# Altium PCB A540R260_ARM2.PcbDoc
Units mm, origin at the board's own origin, x right, y up, seen from the top; angles counter-clockwise.
Board outline 159 x 60.2 mm, 4 copper layers (Top Layer, 5V, GND, Bottom Layer), stack 1.741 mm thick; 32 components, 145 nets, 341 pads, 93 vias.
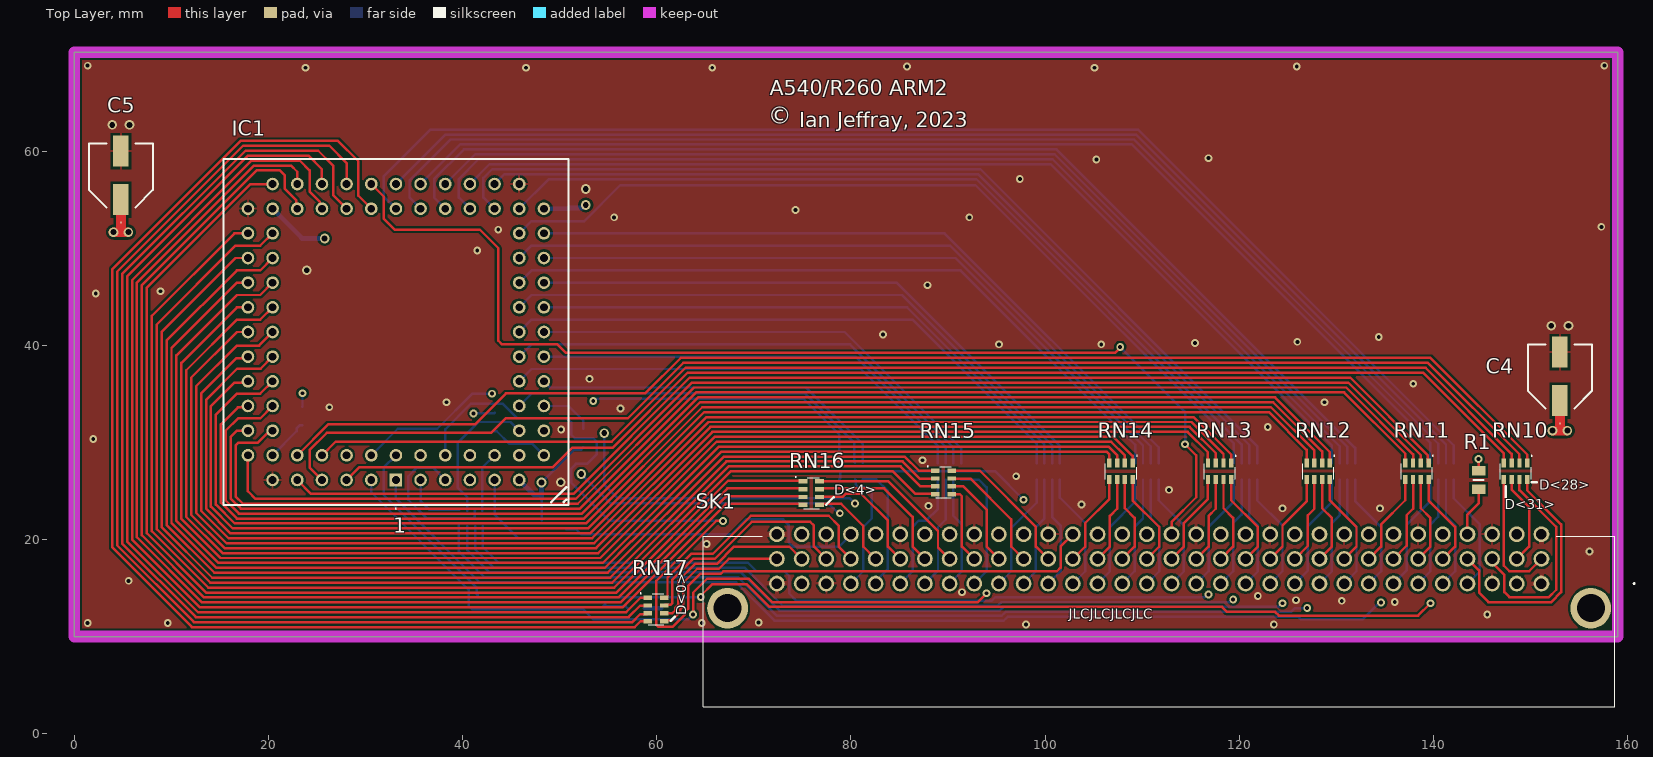
[diagram p0: Top Layer view]
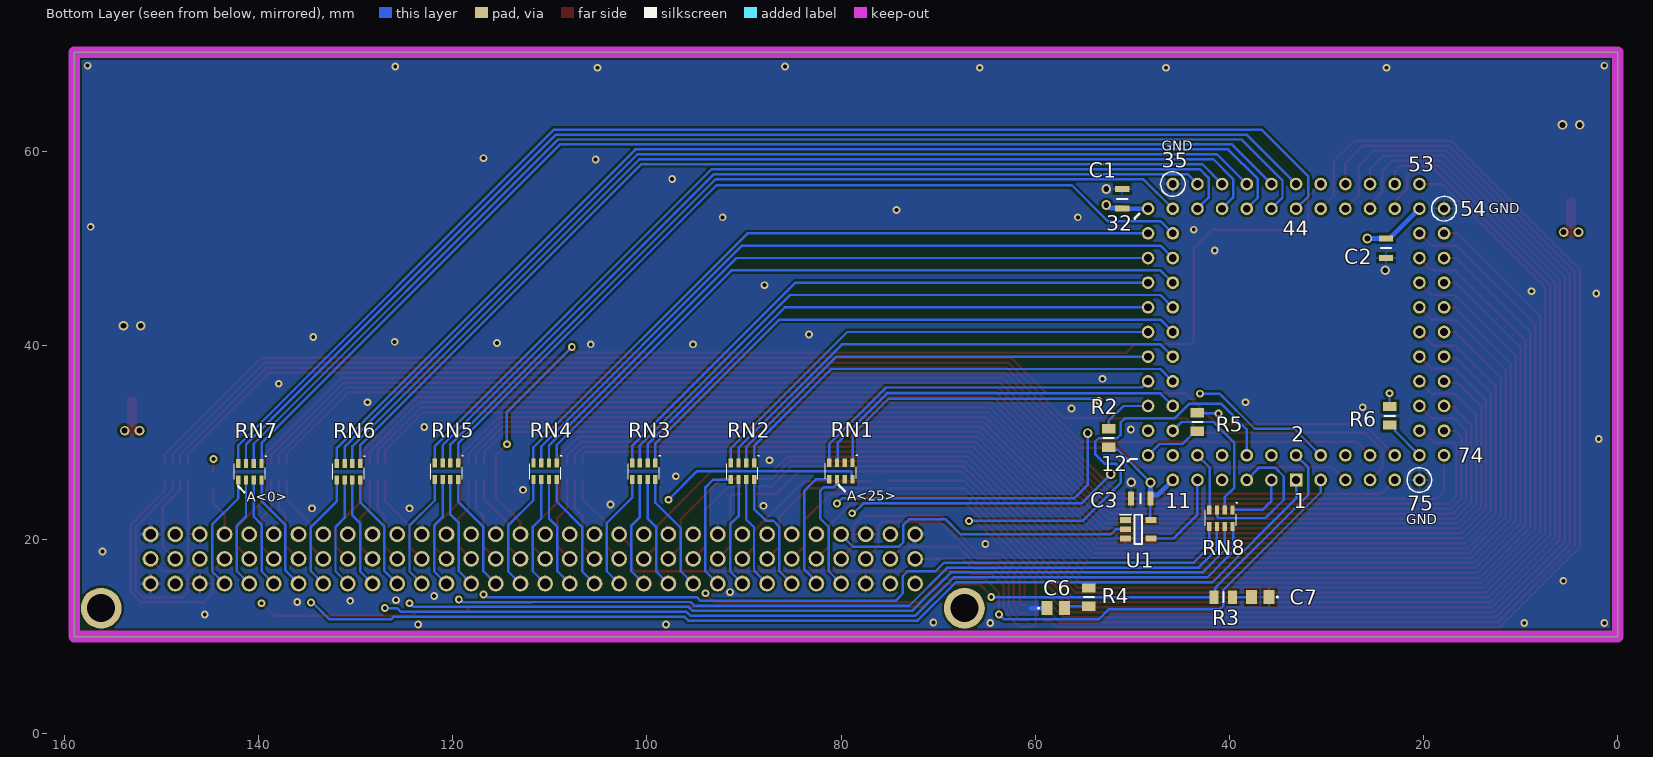
[diagram p1: Bottom Layer view, seen from below]
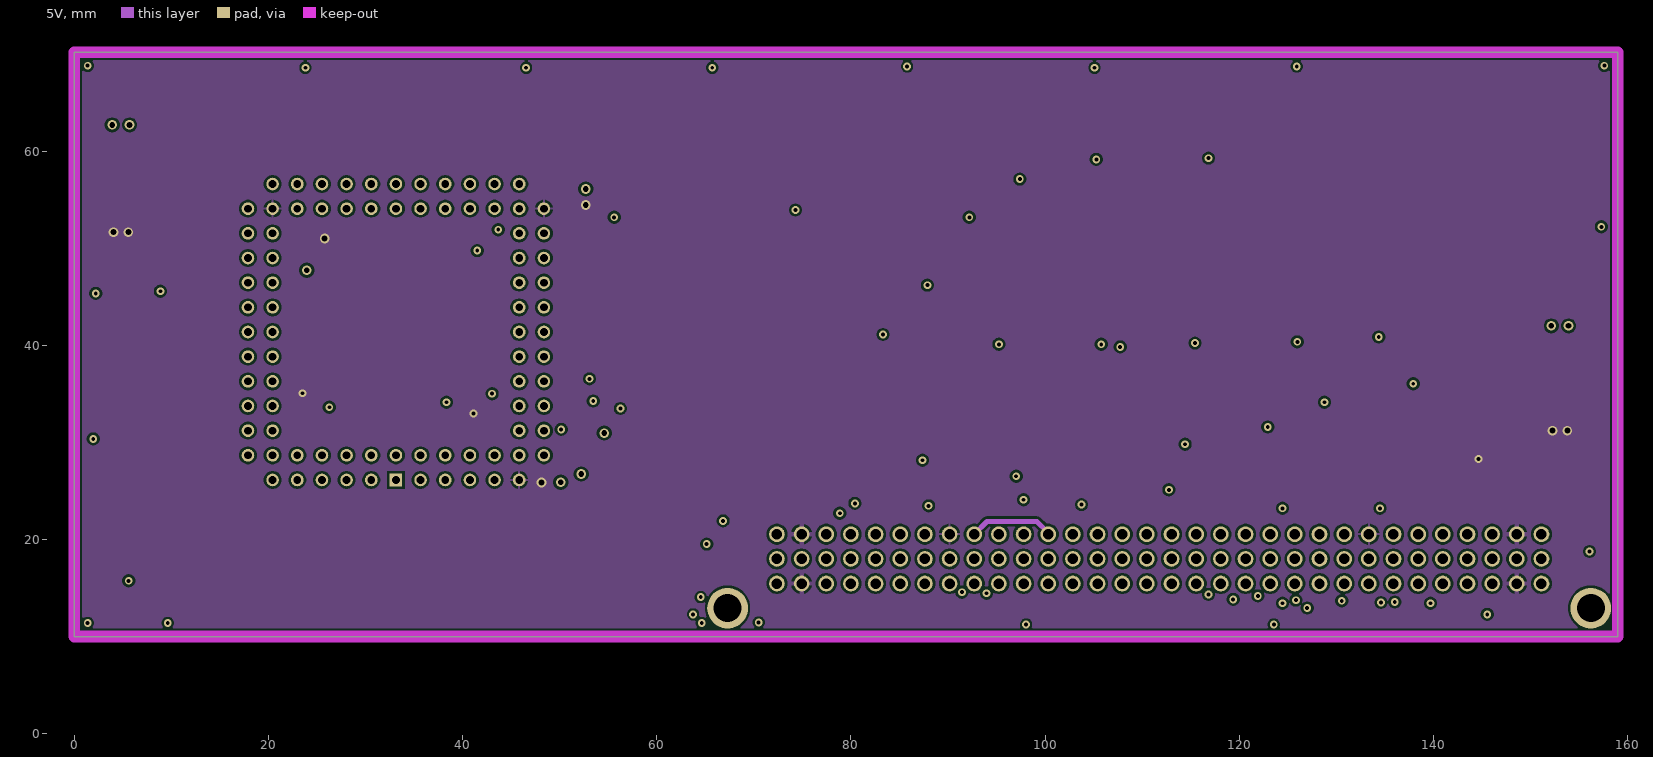
[diagram p2: 5V]
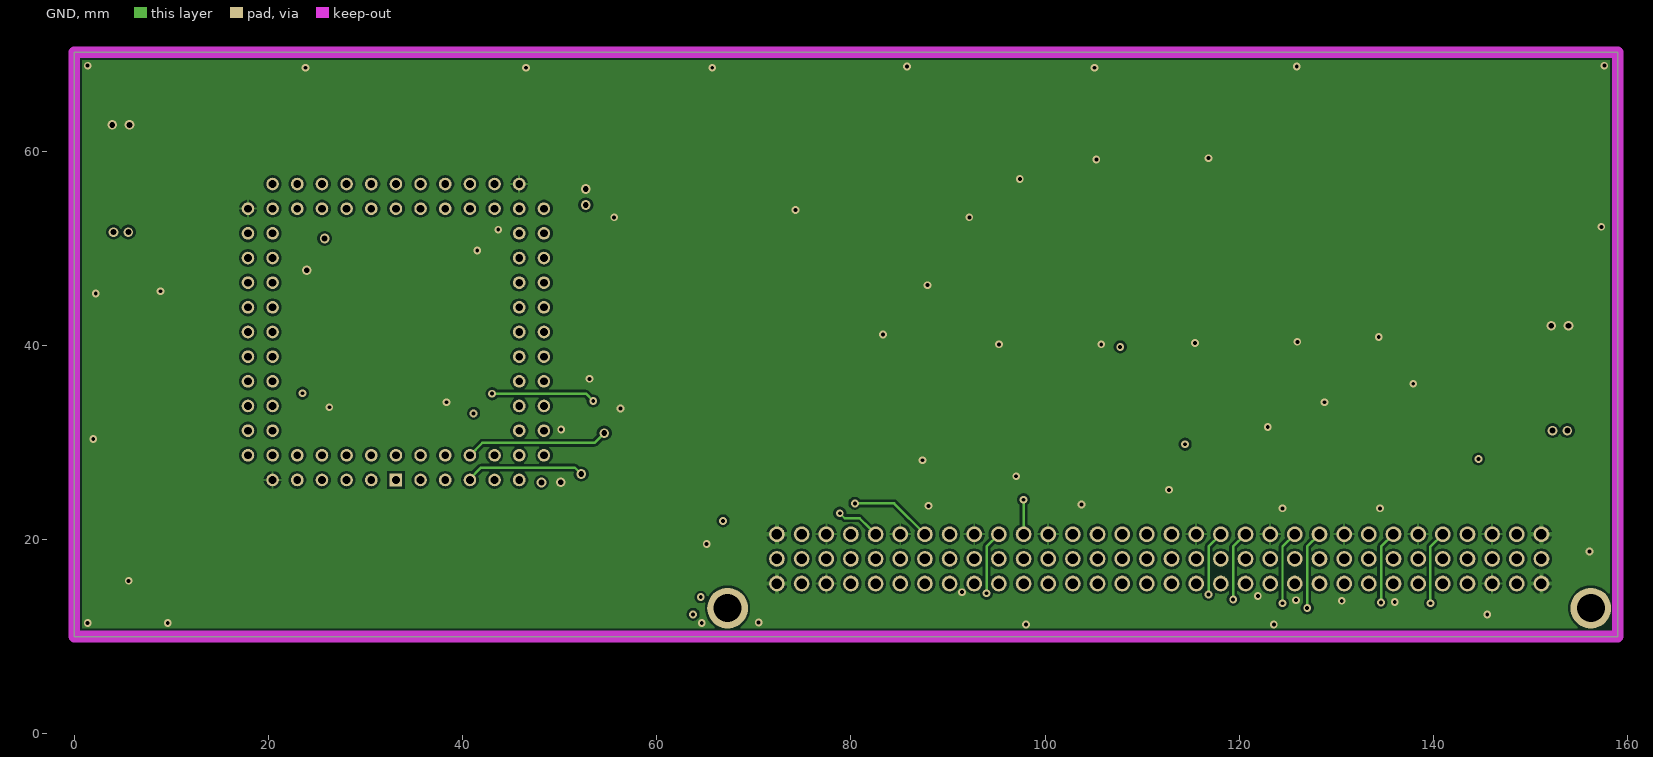
[diagram p3: GND]
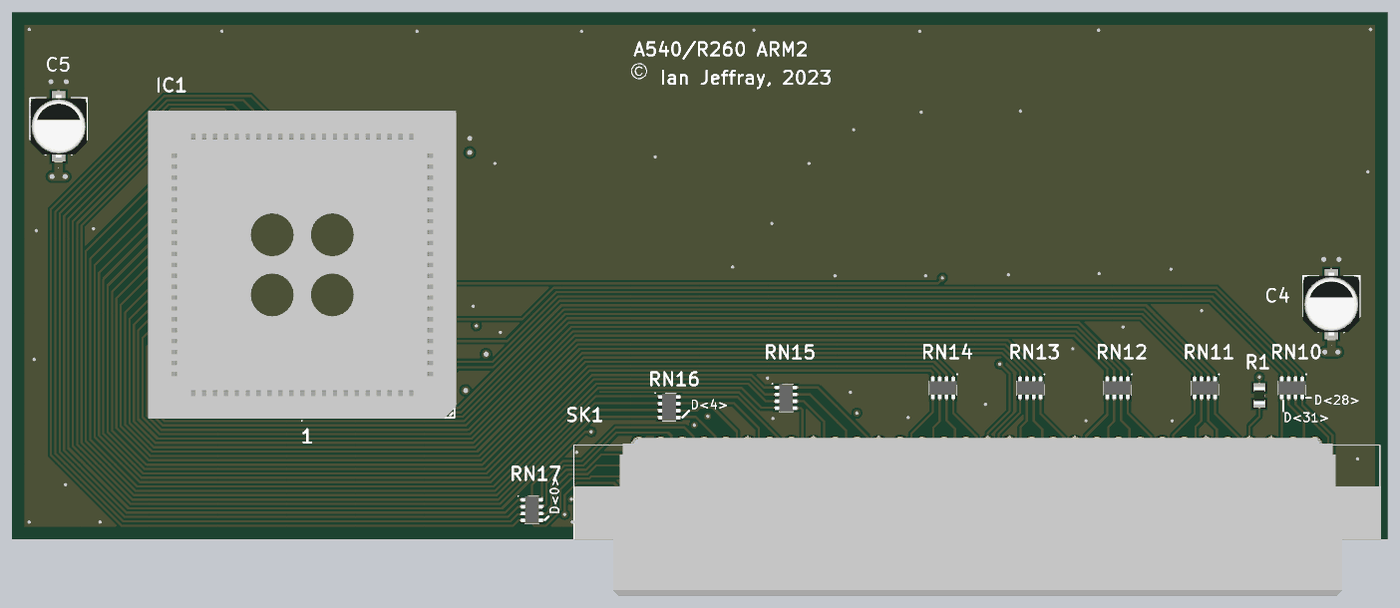
[diagram p4: 3D render of the assembled board from above, using the file's embedded part models]
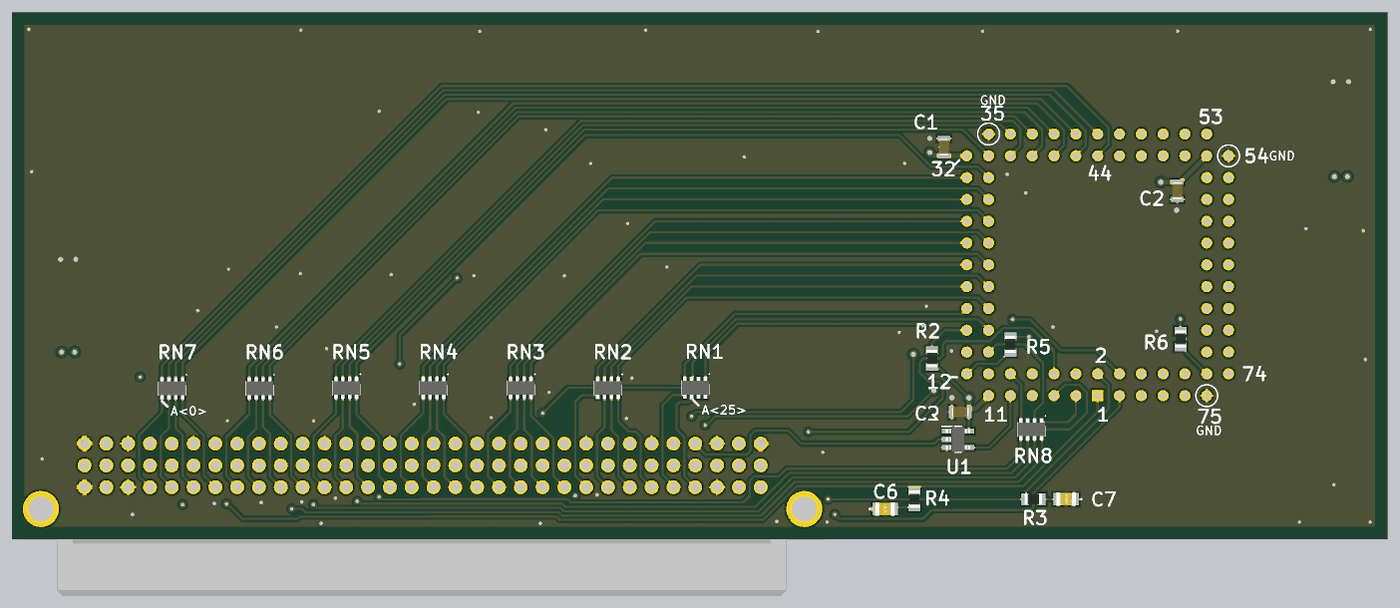
[diagram p5: 3D render of the assembled board from below, using the file's embedded part models]

## Layer stack, top to bottom
Top Solder: solder mask 0.0102, Solder Resist, Dk 3.5
Top Layer: signal copper 0.0356
Dielectric 1: dielectric 0.2, FR-4, Dk 4.8
5V: signal copper 0.035
Dielectric 2: core 1.2, PP-006, Dk 4.1
GND: signal copper 0.035
Dielectric2: dielectric 0.2, FR-4, Dk 4.8
Bottom Layer: signal copper 0.0356
Bottom Solder: solder mask 0.0102, Solder Resist, Dk 3.5

## Board outline
0,10.033 0,70.231 159.004,70.231 159.004,10.033

## Design rules (kind name [scope] priority, off if disabled: settings)
Clearance [All] p1: gap=0.254 ignorepadtopadclearanceinfootprint=FALSE except(0: Arc-Hole Track-Hole SMDPad-Hole THPad-Hole Via-Hole Fill-Hole Poly-Hole Region-Hole Text-Hole)
PolygonConnect [All] p1: connectstyle=Relief reliefconductorwidth=0.254 reliefentries=4 polygonreliefangle="90 Angle" airgapwidth=0.254
RoutingVias [All] p1: holewidth=0.711 width=1.27 viastyle="Through Hole" minholewidth=0.711 minwidth=1.27 maxholewidth=0.711 maxwidth=1.27
SolderMaskExpansion [All] p1: expansion=0.102 istentingtop=FALSE
Width [All] p1: maxlimit=0.254 minlimit=0.254 preferedwidth=0.254
30 further rules are at their usual default settings.

## Components (designator, comment, footprint, x,y, rotation, side; value= is the part's Value field where it differs from the comment)
C1 "100nF" CAPC2012X145N 51.054,55.118 r90 bottom
C2 "100nF" CAPC2012X145N 23.876,50.038 r270 bottom
C3 "100nF" CAPC2012X145N 49.149,24.257 r0 bottom
C4 "47uF" EEE1AA101SP 153.035,36.83 r90 top
C5 "47uF" EEE1AA101SP 4.826,57.531 r90 top
C6 "22pF" C0805 57.912,12.954 r180 bottom
C7 "22pF" C0805 36.83,14.097 r0 bottom
IC1 "PLCC84 SOCKET (ARM2)" PLCC84ATN 33.147,26.162 r180 top locked
R1 "10K" RESC2012X60N 144.653,26.162 r90 top
R2 "100R" RESC2012X60N 52.451,30.48 r270 bottom
R3 "100R" RESC2012X60N 40.64,14.097 r0 bottom
R4 "100R" RESC2012X60N 54.483,14.097 r90 bottom
R5 "100R" RESC2012X60N 43.307,32.131 r90 bottom
R6 "100R" RESC2012X60N 23.495,32.766 r90 bottom
RN1 "YC164-JR-0722RL" YC164JR072K2L 80.029,27.09 r0 bottom
RN2 "YC164-JR-0722RL" YC164JR072K2L 90.17,27.051 r0 bottom
RN3 "YC164-JR-0722RL" YC164JR072K2L 100.33,27.051 r0 bottom
RN4 "YC164-JR-0722RL" YC164JR072K2L 110.49,27.051 r0 bottom
RN5 "YC164-JR-0722RL" YC164JR072K2L 120.65,27.051 r0 bottom
RN6 "YC164-JR-0722RL" YC164JR072K2L 130.74,27.012 r0 bottom
RN7 "YC164-JR-0722RL" YC164JR072K2L 140.9,27.012 r0 bottom
RN8 "YC164-JR-0722RL" YC164JR072K2L 40.894,22.225 r0 bottom
RN10 "YC164-JR-0722RL" YC164JR072K2L 148.463,27.051 r180 top
RN11 "YC164-JR-0722RL" YC164JR072K2L 138.303,27.051 r180 top
RN12 "YC164-JR-0722RL" YC164JR072K2L 128.143,27.051 r180 top
RN13 "YC164-JR-0722RL" YC164JR072K2L 117.983,27.051 r180 top
RN14 "YC164-JR-0722RL" YC164JR072K2L 107.823,27.051 r180 top
RN15 "YC164-JR-0722RL" YC164JR072K2L 89.535,25.908 r270 top
RN16 "YC164-JR-0722RL" YC164JR072K2L 75.927,24.813 r270 top
RN17 "YC164-JR-0722RL" YC164JR072K2L 59.944,12.827 r270 top
SK1 "5650461-4 / 5650895-4" 56504614 151.13,15.494 r0 top locked
U1 "74LVC1G14W5-7" SOT95P285X140-5N 49.403,21.082 r180 bottom

## Footprints (in the part's own frame and the unit in brackets; to place one, negate y for a bottom-side part, rotate by r counter-clockwise, add the part's x,y. Pads: shape width x height; smd on the part's side, far side on the other; paste and mask are expansions set on the pad)
56504614 [mm]
  round 1.62 hole 1.08: A1(0,0) A2(-2.54,0) A3(-5.08,0) A4(-7.62,0) A5(-10.16,0) A6(-12.7,0) A7(-15.24,0) A8(-17.78,0) A9(-20.32,0) A10(-22.86,0) A11(-25.4,0) A12(-27.94,0) A13(-30.48,0) A14(-33.02,0) A15(-35.56,0) A16(-38.1,0) A17(-40.64,0) A18(-43.18,0) A19(-45.72,0) A20(-48.26,0) A21(-50.8,0) A22(-53.34,0) A23(-55.88,0) A24(-58.42,0) A25(-60.96,0) A26(-63.5,0) A27(-66.04,0) A28(-68.58,0) A29(-71.12,0) A30(-73.66,0) A31(-76.2,0) A32(-78.74,0) B1(0,2.54) B2(-2.54,2.54) B3(-5.08,2.54) B4(-7.62,2.54) B5(-10.16,2.54) B6(-12.7,2.54) B7(-15.24,2.54) B8(-17.78,2.54) B9(-20.32,2.54) B10(-22.86,2.54) B11(-25.4,2.54) B12(-27.94,2.54) B13(-30.48,2.54) B14(-33.02,2.54) B15(-35.56,2.54) B16(-38.1,2.54) B17(-40.64,2.54) B18(-43.18,2.54) B19(-45.72,2.54) B20(-48.26,2.54) B21(-50.8,2.54) B22(-53.34,2.54) B23(-55.88,2.54) B24(-58.42,2.54) B25(-60.96,2.54) B26(-63.5,2.54) B27(-66.04,2.54) B28(-68.58,2.54) B29(-71.12,2.54) B30(-73.66,2.54) B31(-76.2,2.54) B32(-78.74,2.54) C1(0,5.08) C2(-2.54,5.08) C3(-5.08,5.08) C4(-7.62,5.08) C5(-10.16,5.08) C6(-12.7,5.08) C7(-15.24,5.08) C8(-17.78,5.08) C9(-20.32,5.08) C10(-22.86,5.08) C11(-25.4,5.08) C12(-27.94,5.08) C13(-30.48,5.08) C14(-33.02,5.08) C15(-35.56,5.08) C16(-38.1,5.08) C17(-40.64,5.08) C18(-43.18,5.08) C19(-45.72,5.08) C20(-48.26,5.08) C21(-50.8,5.08) C22(-53.34,5.08) C23(-55.88,5.08) C24(-58.42,5.08) C25(-60.96,5.08) C26(-63.5,5.08) C27(-66.04,5.08) C28(-68.58,5.08) C29(-71.12,5.08) C30(-73.66,5.08) C31(-76.2,5.08) C32(-78.74,5.08)
  round 4.2 hole 2.89: MH1(5.08,-2.54) MH2(-83.82,-2.54)
  silkscreen extent -86.31,-12.7 9.6,4.88, body extent -86.26,-12.61 7.72,5.75, height 9.21
C0805 [mm]
  rect 1.15x1.45 smd: 1(-0.9,0) 2(0.9,0)
  silkscreen extent -1.8,-0.05 -1.7,0.05, body extent -1.15,-0.78 1.15,0.77, height 0.98
CAPC2012X145N [mm]
  rect 0.62x1.47 smd: 1(-1,0) 2(1,0)
  silkscreen extent 0,-0.53 0,0.53, body extent -1,-0.63 1,0.63, height 1.45
EEE1AA101SP [mm]
  rect 3.2x1.6 smd: 1(-2.5,0) 2(2.5,0)
  silkscreen extent -4.88,-3.3 3.3,3.3, body extent 0,0 0,0
PLCC84ATN [mm]
  rect 1.3x1.3 hole 0.8: 1(0,0)
  round 1.3 hole 0.8: 2(0,-2.54) 3(-2.54,0) 4(-2.54,-2.54) 5(-5.08,0) 6(-5.08,-2.54) 7(-7.62,0) 8(-7.62,-2.54) 9(-10.16,0) 10(-10.16,-2.54) 11(-12.7,0) 12(-15.24,-2.54) 13(-12.7,-2.54) 14(-15.24,-5.08) 15(-12.7,-5.08) 16(-15.24,-7.62) 17(-12.7,-7.62) 18(-15.24,-10.16) 19(-12.7,-10.16) 20(-15.24,-12.7) 21(-12.7,-12.7) 22(-15.24,-15.24) 23(-12.7,-15.24) 24(-15.24,-17.78) 25(-12.7,-17.78) 26(-15.24,-20.32) 27(-12.7,-20.32) 28(-15.24,-22.86) 29(-12.7,-22.86) 30(-15.24,-25.4) 31(-12.7,-25.4) 32(-15.24,-27.94) 33(-12.7,-30.48) 34(-12.7,-27.94) 35(-10.16,-30.48) 36(-10.16,-27.94) 37(-7.62,-30.48) 38(-7.62,-27.94) 39(-5.08,-30.48) 40(-5.08,-27.94) 41(-2.54,-30.48) 42(-2.54,-27.94) 43(0,-30.48) 44(0,-27.94) 45(2.54,-30.48) 46(2.54,-27.94) 47(5.08,-30.48) 48(5.08,-27.94) 49(7.62,-30.48) 50(7.62,-27.94) 51(10.16,-30.48) 52(10.16,-27.94) 53(12.7,-30.48) 54(15.24,-27.94) 55(12.7,-27.94) 56(15.24,-25.4) 57(12.7,-25.4) 58(15.24,-22.86) 59(12.7,-22.86) 60(15.24,-20.32) 61(12.7,-20.32) 62(15.24,-17.78) 63(12.7,-17.78) 64(15.24,-15.24) 65(12.7,-15.24) 66(15.24,-12.7) 67(12.7,-12.7) 68(15.24,-10.16) 69(12.7,-10.16) 70(15.24,-7.62) 71(12.7,-7.62) 72(15.24,-5.08) 73(12.7,-5.08) 74(15.24,-2.54) 75(12.7,0) 76(12.7,-2.54) 77(10.16,0) 78(10.16,-2.54) 79(7.62,0) 80(7.62,-2.54) 81(5.08,0) 82(5.08,-2.54) 83(2.54,0) 84(2.54,-2.54)
  silkscreen extent -17.78,-33.04 17.78,3, body extent -17.99,-33.18 17.89,2.7, height 8.5
RESC2012X60N [mm]
  rect 0.95x1.4 smd: 1(-0.95,0) 2(0.95,0)
  silkscreen extent 0,-0.53 0,0.53, body extent -1,-0.63 1,0.63, height 0.6
SOT95P285X140-5N [mm]
  rect 1.15x0.6 smd: 1(-1.3,0.95) 2(-1.3,0) 3(-1.3,-0.95) 4(1.3,-0.95) 5(1.3,0.95)
  silkscreen extent -1.88,-1.5 0.38,1.5, body extent -1.43,-1.5 1.43,1.5, height 1.4
YC164JR072K2L [mm]
  rect 0.45x0.9 smd: 1(-1.2,-0.85) 2(-0.4,-0.85) 3(0.4,-0.85) 4(1.2,-0.85) 5(1.2,0.85) 6(0.4,0.85) 7(-0.4,0.85) 8(-1.2,0.85)
  silkscreen extent -1.7,-1.65 1.6,0.8, body extent -1.6,-1.25 1.6,1.25, height 0.8

## Part data
C1 C2 C3: library part C2012X7R1H104K125AM, "Capacitor", Manufacturer_Name=TDK, Mouser Part Number=810-C2012X7R1H104KT5, Arrow Part Number=C2012X7R1H104K125AM, Arrow Price/Stock=https://www.arrow.com/en/products/c2012x7r1h104k125am/tdk, Datasheet Link=https://product.tdk.com/info/en/catalog/datasheets/mlcc_commercial_midvoltage_en.pdf, Height=1.45mm, Manufacturer_Part_Number=C2012X7R1H104K125AM, Mouser Price/Stock=https://www.mouser.com/Search/Refine.aspx?Keyword=810-C2012X7R1H104KT5
C4 C5: library part EEE1VA470WP, "Capacitor Polarised", Manufacturer_Name=Panasonic, Datasheet Link=http://industrial.panasonic.com/cdbs/www-data/pdf/RDE0000/ABA0000C1145.pdf, Height=7.8mm, Manufacturer_Part_Number=EEE1VA470WP
C6 C7: library part C0805C220J5GACTU, "Capacitor", Manufacturer_Name=KEMET, Mouser Part Number=80-C0805C220J5G, Arrow Part Number=C0805C220J5GACTU, Arrow Price/Stock=https://www.arrow.com/en/products/c0805c220j5gactu/kemet-corporation?region=nac, Datasheet Link=https://content.kemet.com/datasheets/KEM_C1003_C0G_SMD.pdf, Height=1.1mm, Manufacturer_Part_Number=C0805C220J5GACTU, Mouser Price/Stock=https://www.mouser.co.uk/ProductDetail/KEMET/C0805C220J5GACTU?qs=4DgSOGFclrMUW3bJDWrdLw%3D%3D
IC1: library part PLCC84_PLUG_ARM2, "PLCC84 Plug", Manufacturer_Name=Winslow, Manufacturer_Part_Number=W9328, Height=15mm
R1: library part RC0805JR-0710KL, "Resistor", Manufacturer_Name=KEMET, Mouser Part Number=603-RC0805JR-0710KL, Arrow Part Number=RC0805JR-0710KL, Arrow Price/Stock=https://www.arrow.com/en/products/rc0805jr-0710kl/yageo, Datasheet Link=https://datasheet.datasheetarchive.com/originals/distributors/Datasheets_SAMA/902f9e387b938f871d31120f5fc1d65e.pdf, Height=0.6mm, Manufacturer_Part_Number=RC0805JR-0710KL, Mouser Price/Stock=https://www.mouser.co.uk/ProductDetail/YAGEO/RC0805JR-0710KL?qs=ZFGQJeMQzF5q%2Fp77vM%2FrVQ%3D%3D
R2 R3 R4 R5 R6: library part RC0805FR-07100RL, "Resistor", Manufacturer_Name=KEMET, Mouser Part Number=603-RC0805FR-07100RL, Arrow Part Number=RC0805FR-07100RL, Arrow Price/Stock=https://www.arrow.com/en/products/rc0805fr-07100rl/yageo?region=europe, Datasheet Link=https://datasheet.datasheetarchive.com/originals/distributors/Datasheets_SAMA/902f9e387b938f871d31120f5fc1d65e.pdf, Height=0.6mm, Manufacturer_Part_Number=RC0805FR-07100RL, Mouser Price/Stock=https://www.mouser.co.uk/ProductDetail/YAGEO/RC0805FR-07100RL?qs=8Y8p%252BasKcI6MtXUgG4E6SQ%3D%3D
RN1 RN2 RN3 RN4 RN5 RN6 RN7 RN8 RN10 RN11 RN12 RN13 RN14 RN15 RN16 RN17: "Resistor Network", Manufacturer_Name=KEMET, Mouser Part Number=603-YC164-JR-0722RL, Arrow Part Number=YC164-JR-0722RL, Arrow Price/Stock=https://www.arrow.com/en/products/yc164-jr-0722rl/yageo, Datasheet Link=https://componentsearchengine.com/Datasheets/2/YC164-JR-072K2L.pdf, Height=0.7mm, Manufacturer_Part_Number=YC164-JR-0722RL, Mouser Price/Stock=https://www.mouser.co.uk/ProductDetail/YAGEO/YC164-JR-0722RL?qs=PUN631quMycSauRlrBstDw%3D%3D
SK1: library part 5650461-4, "Connector", Manufacturer_Name="TE Connectivity", Mouser Part Number=571-5650461-4, Arrow Part Number=5650461-4, Arrow Price/Stock=https://www.arrow.com/en/products/5650461-4/te-connectivity, Datasheet Link=https://componentsearchengine.com/Datasheets/2/5650461-4.pdf, Height=10.49mm, Manufacturer_Part_Number=5650461-4, Mouser Price/Stock=https://www.mouser.co.uk/ProductDetail/TE-Connectivity/5650461-4?qs=xrnNvQC1SKQ%2FjdFwmiH0Uw%3D%3D
U1: "Undefined or Miscellaneous", Manufacturer_Name="Diodes Inc.", Mouser Part Number=621-74LVC1G14W5-7, Arrow Part Number=74LVC1G14W5-7, Arrow Price/Stock=https://www.arrow.com/en/products/74lvc1g14w5-7/diodes-incorporated?region=nac, Datasheet Link=https://componentsearchengine.com/Datasheets/2/74LVC1G14W5-7.pdf, Height=1.4mm, Manufacturer_Part_Number=74LVC1G14W5-7, Mouser Price/Stock=https://www.mouser.co.uk/ProductDetail/Diodes-Incorporated/74LVC1G14W5-7?qs=FRHfhEBFk1cKmKLlF8IuuQ%3D%3D

## Via types
v1: diameter 0.8, hole 0.4, Top Layer to Bottom Layer, tented both sides, 77 vias
v2: diameter 1, hole 0.6, Top Layer to Bottom Layer, tented both sides, 16 vias

## Nets (pads, with @x,y where several pads share a name; then routed paths per layer and width w, separated by ;. In a path a pad name is that pad's centre, name@x,y a point inside that pad or via, vN(x,y) a via of type N, cw(c..) or ccw(c..) an arc to the next point about the centre after c; other vN are vias at no path point)
5V: C1.1 C2.1 C3.1 C4.1 C5.1 IC1.11 IC1.32 IC1.55 R1.2 R2.2 R5.2 R6.2 SK1.A2 SK1.A31 SK1.C2 SK1.C8 SK1.C25 SK1.C31 U1.5 | length 38
  Top Layer w0.254: R1.2 v1(144.653,28.321)
  Top Layer w1: v2(4.064,51.689) 4.826,51.689 ; C5.1@4.826,54.777 4.826,51.689 ; v2(5.588,51.689) 4.826,51.689 ; v2(152.273,31.242) 153.035,31.242 ; C4.1 153.035,31.242 ; v2(153.797,31.242) 153.035,31.242
  Bottom Layer w0.254: R6.2 23.526,33.747 v1(23.526,35.091) ; v1(41.148,33.02) 43.246,33.02 R5.2 ; IC1.11 IC1.11@45.855,26.154 ; C3.1@48.133,24.774 C3.1@48.296,24.611 ; v2(48.133,25.908) 51.519,29.294 52.215,29.294 R2.2 ; U1.5@48.149,22.032 C3.1 C3.1@48.26,24.368 ; IC1.32 IC1.32@48.395,54.11
  Bottom Layer w0.5: IC1.55 23.391,51.158 23.391,51.098 23.451,51.038 C2.1 v2(25.802,51.038) ; IC1.11@45.855,26.154 47.398,24.611 48.089,24.611 48.149,24.551 C3.1 ; C3.1@48.133,24.774 v2(48.133,25.908) ; IC1.32@48.395,54.11 48.403,54.102 50.973,54.102 51.049,54.178 52.265,54.178 52.57,54.483 v2(52.705,54.483)
A0: IC1.44 RN7.4 | length 131.4
  Bottom Layer w0.254: IC1.44 31.877,55.372 31.877,57.404 36.718,62.245 109.582,62.245 142.1,29.727 RN7.4
A1: IC1.43 RN7.3 | length 125.4
  Bottom Layer w0.254: IC1.43 38.242,61.737 109.372,61.737 141.3,29.809 RN7.3
A2: IC1.42 RN7.2 | length 126.1
  Bottom Layer w0.254: IC1.42 34.544,55.245 34.544,57.023 38.75,61.229 109.161,61.229 140.5,29.89 RN7.2
A3: IC1.41 RN7.1 | length 120.5
  Bottom Layer w0.254: IC1.41 39.766,60.721 108.951,60.721 139.7,29.972 RN7.1
A4: IC1.40 RN6.4 | length 114
  Bottom Layer w0.254: IC1.40 37.084,55.245 37.084,57.15 40.147,60.213 101.2,60.213 131.94,29.473 RN6.4
A5: IC1.39 RN6.3 | length 108.4
  Bottom Layer w0.254: IC1.39 41.29,59.705 100.99,59.705 131.14,29.555 RN6.3
A6: IC1.38 RN6.2 | length 109.1
  Bottom Layer w0.254: IC1.38 39.624,55.245 39.624,57.15 41.671,59.197 100.779,59.197 130.34,29.636 RN6.2
A7: IC1.37 RN6.1 | length 103.5
  Bottom Layer w0.254: IC1.37 42.814,58.689 100.569,58.689 129.54,29.718 RN6.1
A8: IC1.36 RN5.4 | length 97.3
  Bottom Layer w0.254: IC1.36 42.164,55.245 42.164,57.277 43.068,58.181 93.326,58.181 121.85,29.657 RN5.4
A9: IC1.35 RN5.3 | length 91.6
  Bottom Layer w0.254: IC1.35 44.338,57.673 93.116,57.673 121.05,29.739 RN5.3
A10: IC1.34 RN5.2 | length 88.9
  Bottom Layer w0.254: IC1.34 48.895,57.15 92.92,57.15 120.25,29.82 RN5.2
A11: IC1.31 RN5.1 | length 88.7
  Bottom Layer w0.254: IC1.31 47.117,52.832 52.554,52.832 56.237,56.515 92.837,56.515 96.52,52.832 119.45,29.902 RN5.1
A12: IC1.30 RN4.4 | length 74.1
  Bottom Layer w0.254: IC1.30 89.658,51.562 111.69,29.53 RN4.4
A13: IC1.29 RN4.3 | length 75.8
  Bottom Layer w0.254: IC1.29 47.117,50.292 90.21,50.292 110.89,29.612 RN4.3
A14: IC1.28 RN4.2 | length 71.5
  Bottom Layer w0.254: IC1.28 90.761,49.022 110.09,29.693 RN4.2
A15: IC1.27 RN4.1 | length 73.3
  Bottom Layer w0.254: IC1.27 47.117,47.752 91.313,47.752 109.29,29.775 RN4.1
A16: IC1.26 RN3.4 | length 61.9
  Bottom Layer w0.254: IC1.26 84.705,46.482 101.53,29.657 RN3.4
A17: IC1.25 RN3.3 | length 63.7
  Bottom Layer w0.254: IC1.25 47.117,45.212 85.257,45.212 100.73,29.739 RN3.3
A18: IC1.24 RN3.2 | length 59.3
  Bottom Layer w0.254: IC1.24 85.808,43.942 99.93,29.82 RN3.2
A19: IC1.23 RN3.1 | length 61.1
  Bottom Layer w0.254: IC1.23 47.117,42.672 86.36,42.672 99.13,29.902 RN3.1
A20: IC1.22 RN2.4 | length 49.5
  Bottom Layer w0.254: IC1.22 79.371,41.402 91.37,29.403 RN2.4
A21: IC1.21 RN2.3 | length 51.2
  Bottom Layer w0.254: IC1.21 47.117,40.132 79.923,40.132 90.57,29.485 RN2.3
A22: IC1.20 RN2.2 | length 46.9
  Bottom Layer w0.254: IC1.20 80.474,38.862 89.77,29.566 RN2.2
A23: IC1.19 RN2.1 | length 48.7
  Bottom Layer w0.254: IC1.19 47.117,37.592 81.026,37.592 88.97,29.648 RN2.1
A24: IC1.18 RN1.4 | length 37.4
  Bottom Layer w0.254: IC1.18 49.022,35.687 75.394,35.687 81.229,29.852 RN1.4
A25: IC1.17 RN1.3 | length 39.2
  Bottom Layer w0.254: IC1.17 47.136,35.071 75.292,35.071 80.331,30.032 80.331,28.038 RN1.3
Abort: IC1.6 SK1.C20 | length 108.7
  Top Layer w0.254: v1(66.843,21.945) 66.141,21.945 59.963,15.767 59.963,11.244 60.186,11.021 61.621,11.021 62.926,12.326 62.926,12.596 63.246,12.916 63.246,15.24 64.516,16.51 66.618,16.51 66.872,16.764 101.219,16.764 101.6,17.145 101.6,19.304 SK1.C20
  Bottom Layer w0.254: IC1.6 38.227,31.369 40.894,34.036 44.135,34.036 45.659,32.512 50.778,32.512 51.181,32.109 51.181,30.861 51.562,30.48 53.467,30.48 53.848,30.099 53.848,28.829 52.832,27.813 51.689,27.813 51.181,27.305 51.181,25.908 55.144,21.945 v1(66.843,21.945)
Acbe: IC1.45 SK1.C16 | length 115.4
  Top Layer w0.254: IC1.45 31.914,55.335 31.914,53.049 33.02,51.943 41.783,51.943 43.688,50.038 43.688,40.513 44.069,40.132 49.784,40.132 50.673,39.243 107.188,39.243 v1@107.823,39.878 ; SK1.C16 113.03,21.844 115.57,24.384 115.57,28.702 v1(114.427,29.845) v1@114.427,29.972
  Bottom Layer w0.254: v1(107.74,39.866) 114.427,33.18 v1@114.427,29.718
ALE: IC1.16 R2.1 | length 5.5
  Bottom Layer w0.254: IC1.16 50.927,33.782 52.451,32.258 R2.1
D0: IC1.46 RN17.4 | length 124.6
  Top Layer w0.254: IC1.46 29.274,55.435 29.274,58.991 27.178,61.087 17.145,61.087 3.937,47.879 3.937,19.207 12.13,11.014 57.75,11.014 58.363,11.627 RN17.4
D1: IC1.47 RN17.3 | length 118.4
  Top Layer w0.254: IC1.47 28.067,58.801 26.289,60.579 17.399,60.579 4.445,47.625 4.445,19.417 12.34,11.522 57.496,11.522 58.303,12.329 58.996,12.329 RN17.3
D2: IC1.48 RN17.2 | length 118.2
  Top Layer w0.254: IC1.48 26.67,55.499 26.67,58.547 25.146,60.071 17.653,60.071 4.953,47.371 4.953,19.628 12.551,12.03 57.115,12.03 58.312,13.227 RN17.2
D3: IC1.49 RN17.1 | length 111.9
  Top Layer w0.254: IC1.49 25.527,58.166 24.13,59.563 17.907,59.563 5.461,47.117 5.461,20.066 5.461,19.838 12.761,12.538 56.861,12.538 58.35,14.027 RN17.1
D4: IC1.50 RN16.4 | length 131.5
  Top Layer w0.254: IC1.50 25.327,54.302 25.327,54.81 24.257,55.88 24.257,58.039 23.241,59.055 18.288,59.055 5.969,46.736 5.969,20.276 5.969,20.049 12.972,13.046 56.48,13.046 67.126,23.692 RN16.4@75.223,23.692
D5: IC1.51 RN16.3 | length 125.3
  Top Layer w0.254: IC1.51 22.987,57.912 22.352,58.547 18.542,58.547 6.477,46.482 6.477,20.487 6.477,20.259 13.182,13.554 56.27,13.554 67.208,24.492 RN16.3@75.223,24.492
D6: IC1.52 RN16.2 | length 125.1
  Top Layer w0.254: IC1.52 22.893,54.196 22.893,54.958 21.717,56.134 21.717,57.531 21.209,58.039 18.796,58.039 6.985,46.228 6.985,20.697 6.985,20.469 13.392,14.062 56.059,14.062 67.289,25.292 RN16.2@75.223,25.292
D7: IC1.53 RN16.1 | length 117.7
  Top Layer w0.254: IC1.53 18.161,56.642 7.493,45.974 7.493,20.908 7.493,20.68 13.603,14.57 55.849,14.57 67.371,26.092 RN16.1@75.223,26.092
D8: IC1.56 RN15.4 | length 124.6
  Top Layer w0.254: IC1.56 16.51,51.562 8.001,43.053 8.001,20.89 13.813,15.078 55.638,15.078 67.611,27.051 84.328,27.051 86.614,24.765 88.628,24.765 RN15.4
D9: IC1.57 RN15.3 | length 125.2
  Top Layer w0.254: IC1.57 19.177,50.292 16.637,50.292 8.509,42.164 8.509,21.101 14.024,15.586 55.428,15.586 67.401,27.559 85.119,27.559 87.17,25.508 RN15.3
D10: IC1.58 RN15.2 | length 119.7
  Top Layer w0.254: IC1.58 16.637,49.022 9.017,41.402 9.017,21.311 14.234,16.094 55.21,16.094 67.183,28.067 85.33,28.067 87.089,26.308 RN15.2
D11: IC1.59 RN15.1 | length 120.2
  Top Layer w0.254: IC1.59 19.177,47.752 16.764,47.752 9.525,40.513 9.525,21.522 14.445,16.602 54.956,16.602 66.929,28.575 85.54,28.575 87.007,27.108 RN15.1
D12: IC1.60 RN14.4 | length 133.2
  Top Layer w0.254: IC1.60 16.764,46.482 10.033,39.751 10.033,21.967 10.033,21.732 14.655,17.11 54.658,17.11 57.418,19.87 57.462,19.87 66.675,29.083 106.343,29.083 106.623,28.803 RN14.4
D13: IC1.61 RN14.3 | length 134.9
  Top Layer w0.254: IC1.61 19.177,45.212 16.764,45.212 10.541,38.989 10.541,22.178 10.541,21.942 14.865,17.618 54.448,17.618 66.421,29.591 106.553,29.591 107.423,28.721 RN14.3
D14: IC1.62 RN14.2 | length 130.5
  Top Layer w0.254: IC1.62 16.764,43.942 11.049,38.227 11.049,22.388 11.049,22.153 15.076,18.126 54.194,18.126 66.167,30.099 106.807,30.099 108.223,28.683 RN14.2
D15: IC1.63 RN14.1 | length 132.2
  Top Layer w0.254: IC1.63 19.177,42.672 16.764,42.672 11.557,37.465 11.557,22.599 11.557,22.363 15.286,18.634 53.984,18.634 65.957,30.607 107.061,30.607 109.023,28.645 RN14.1
D16: IC1.64 RN13.4 | length 135
  Top Layer w0.254: IC1.64 16.764,41.402 12.065,36.703 12.065,22.809 12.065,22.574 15.497,19.142 53.773,19.142 65.746,31.115 114.681,31.115 116.783,29.013 RN13.4
D17: IC1.65 RN13.3 | length 136.6
  Top Layer w0.254: IC1.65 19.05,40.005 16.764,40.005 12.573,35.814 12.573,23.019 12.573,22.784 15.707,19.65 53.563,19.65 65.536,31.623 114.891,31.623 117.583,28.931 RN13.3
D18: IC1.66 RN13.2 | length 132.2
  Top Layer w0.254: IC1.66 17.749,38.704 16.733,38.704 13.081,35.052 13.081,23.23 13.081,22.994 15.917,20.158 53.352,20.158 65.325,32.131 115.102,32.131 118.383,28.85 RN13.2
D19: IC1.67 RN13.1 | length 134
  Top Layer w0.254: IC1.67 19.204,37.619 16.791,37.619 13.589,34.417 13.589,23.589 13.589,23.205 16.128,20.666 53.142,20.666 65.115,32.639 115.312,32.639 119.183,28.768 RN13.1
D20: IC1.68 RN12.4 | length 136.9
  Top Layer w0.254: IC1.68 17.743,36.158 16.473,36.158 14.097,33.782 14.097,23.799 14.097,23.415 16.338,21.174 52.931,21.174 64.904,33.147 123.063,33.147 126.943,29.267 RN12.4
D21: IC1.69 RN12.3 | length 138.6
  Top Layer w0.254: IC1.69 19.177,35.052 16.764,35.052 14.605,32.893 14.605,24.01 14.605,23.626 16.549,21.682 52.721,21.682 64.694,33.655 123.273,33.655 127.743,29.185 RN12.3
D22: IC1.70 RN12.2 | length 134
  Top Layer w0.254: IC1.70 17.765,33.64 16.876,33.64 15.113,31.877 15.113,24.22 15.113,23.836 16.759,22.19 52.511,22.19 64.484,34.163 123.484,34.163 128.543,29.104 RN12.2
D23: IC1.71 RN12.1 | length 135.8
  Top Layer w0.254: IC1.71 19.177,32.512 16.891,32.512 15.621,31.242 15.621,24.431 15.621,24.047 16.97,22.698 52.3,22.698 64.273,34.671 123.694,34.671 129.343,29.022 RN12.1
D24: IC1.72 RN11.4 | length 138.4
  Top Layer w0.254: IC1.72 16.764,31.242 16.129,30.607 16.129,24.257 17.18,23.206 52.09,23.206 64.063,35.179 130.81,35.179 137.103,28.886 RN11.4
D25: IC1.73 RN11.3 | length 140
  Top Layer w0.254: IC1.73 20.164,31.242 19.837,30.915 19.824,30.915 18.882,29.972 16.891,29.972 16.637,29.718 16.637,24.467 17.39,23.714 51.879,23.714 63.852,35.687 131.02,35.687 137.903,28.804 RN11.3
D26: IC1.74 RN11.2 | length 133.7
  Top Layer w0.254: IC1.74 17.907,24.999 18.684,24.222 51.669,24.222 63.642,36.195 131.231,36.195 138.703,28.723 RN11.2
D27: IC1.77 RN11.1 | length 126.1
  Top Layer w0.254: IC1.77 24.419,24.73 51.437,24.73 63.41,36.703 131.441,36.703 139.412,28.732 139.412,27.992 RN11.1
D28: IC1.78 RN10.1 | length 135.8
  Top Layer w0.254: IC1.78 26.162,31.877 41.275,31.877 44.469,35.071 58.82,35.071 62.484,38.735 139.7,38.735 149.663,28.772 RN10.1
D29: IC1.79 RN10.2 | length 136.8
  Top Layer w0.254: IC1.79 24.257,27.432 24.257,29.254 26.022,31.019 42.957,31.019 44.45,32.512 57.023,32.512 62.738,38.227 139.446,38.227 148.863,28.81 RN10.2
D30: IC1.80 RN10.3 | length 130.9
  Top Layer w0.254: IC1.80 26.924,30.099 55.369,30.099 62.989,37.719 139.192,37.719 148.063,28.848 RN10.3
D31: IC1.81 RN10.4 | length 128.2
  Top Layer w0.254: IC1.81 29.36,27.455 49.276,27.455 51.285,29.464 55.452,29.464 ; 55.476,29.487 55.452,29.464 ; RN10.4 147.263,28.886 138.938,37.211 63.199,37.211 55.452,29.464
Dbe: IC1.83 SK1.C23 | length 82.1
  Top Layer w0.254: v1(63.754,12.319) 63.754,14.547 65.209,16.002 69.469,16.002 71.882,13.589 93.091,13.589 93.98,14.478 v1(93.98,14.497)
  GND w0.254: v1(93.98,14.497) 93.98,19.304 SK1.C23
  Bottom Layer w0.254: IC1.83 30.607,24.894 40.64,14.861 40.64,13.208 41.021,12.827 52.451,12.827 53.467,11.811 63.232,11.811 63.74,12.319 v1(63.754,12.319)
FiqN: IC1.8 SK1.C26 | length 55.3
  GND w0.254: IC1.8 42.037,29.972 53.594,29.972 v2(54.61,30.988) ; v1@80.391,23.749 84.455,23.749 SK1.C26
  Bottom Layer w0.254: v2(54.61,30.988) 54.61,25.654 56.007,24.257 79.913,24.257 v1(80.42,23.75)
GND: C1.2 C2.2 C3.2 C4.2 C5.2 C6.1 C7.1 IC1.33 IC1.54 IC1.75 SK1.A1 SK1.A3 SK1.A30 SK1.A32 SK1.C1 SK1.C3 SK1.C6 SK1.C9 SK1.C12 SK1.C15 SK1.C21 SK1.C24 SK1.C27 SK1.C30 SK1.C32 U1.3 | length 10.4
  5V w0.5: SK1.C24 94.024,21.888 99.167,21.888 100.33,20.725 SK1.C21
  Bottom Layer w0.5: C6.1 60.452,12.954
  other v1: 98.052,11.271 123.568,11.276 1.397,11.43 9.652,11.43 64.643,11.43 70.506,11.488 145.542,12.319 136.017,13.589 130.556,13.716 125.838,13.785 121.92,14.224 91.44,14.605 5.62,15.774 156.083,18.796 65.151,19.558 124.46,23.241 134.493,23.241 88.011,23.495 103.759,23.622 112.757,25.146 97.028,26.543 87.376,28.194 1.978,30.391 50.165,31.369 122.936,31.623 56.263,33.517 26.289,33.655 38.354,34.163 128.778,34.163 137.922,36.068 53.086,36.576 95.25,40.132 105.791,40.132 115.443,40.259 125.984,40.386 134.366,40.894 83.312,41.148 2.232,45.377 8.89,45.593 87.884,46.228 41.529,49.784 43.688,51.943 157.299,52.235 55.626,53.213 92.202,53.213 74.295,53.975 97.409,57.15 105.283,59.182 116.84,59.309 23.822,68.618 46.555,68.618 65.732,68.618 105.102,68.618 85.798,68.745 125.93,68.745 1.397,68.834 157.607,68.834
  other v2: 50.121,25.925 152.146,42.037 153.924,42.037 23.959,47.769 52.705,56.134 3.937,62.738 5.715,62.738
IrqN: IC1.7 SK1.C28 | length 45.2
  GND w0.254: IC1.7 40.767,26.289 41.91,27.432 51.562,27.432 v2(52.227,26.766) ; v1(78.867,22.733) 79.375,22.225 80.899,22.225 81.852,21.273 SK1.C28
  Bottom Layer w0.254: v2(52.227,26.766) 55.244,23.749 77.703,23.749 78.719,22.733 v1(78.867,22.733)
Lock: SK1.C19
MreqN: IC1.5 RN8.3 | length 15.5
  Bottom Layer w0.254: IC1.5 36.957,27.432 35.306,27.432 34.417,26.543 34.417,24.13 36.303,22.244 41.122,22.244 41.27,22.393 41.27,23.051 RN8.3
MresetN: SK1.C29 U1.2 | length 32.9
  Bottom Layer w0.254: U1.2 51.705,21.082 52.213,20.574 67.691,20.574 69.215,22.098 73.025,22.098 73.596,21.527 73.596,19.749 74.041,19.304 78.74,19.304 78.762,19.282 80.01,20.53 SK1.C29
nBW: IC1.84 RN1.1 | length 55.7
  GND w0.254: v1(43.053,35.052) 52.705,35.052 v1(53.467,34.29)
  Bottom Layer w0.254: IC1.84 33.339,31.434 37.403,31.434 41.021,35.052 v1(43.053,35.052) ; v1(53.467,34.29) 53.615,34.29 53.869,34.544 75.101,34.544 78.829,30.816 RN1.1
NetC6_2: C6.2 R4.1 | length 2.9
  Bottom Layer w0.254: R4.1@54.721,13.385 R4.1 56.819,13.147 C6.2
NetC7_2: C7.2 R3.1 | length 1.8
  Bottom Layer w0.254: C7.2 R3.1@39.563,14.097
NetIC1_12: IC1.12 R5.1 | length 6.1
  Bottom Layer w0.254: R5.1 43.532,31.181 44.845,29.868 47.221,29.868 IC1.12
NetIC1_76: IC1.76 R6.1 | length 4.5
  Bottom Layer w0.254: IC1.76 22.922,31.177 22.922,31.468 23.27,31.816 R6.1
nHW: R1.1 SK1.C4 | length 5.1
  Top Layer w0.254: SK1.C4 143.51,22.606 144.653,23.749 R1.1
nRW: IC1.3 RN8.1 | length 6.6
  Bottom Layer w0.254: IC1.3 35.687,24.003 36.615,23.075 RN8.1
Phi1: IC1.2 R3.2 SK1.C5 | length 127.4
  Top Layer w0.254: v1(64.543,14.097) 64.543,14.232 65.746,15.435 69.274,15.435 71.628,13.081 118.237,13.081 118.745,12.573 123.698,12.573 124.079,12.192 124.714,12.192 138.43,12.192 v1(139.7,13.462)
  GND w0.254: v1(139.7,13.462) 139.7,19.304 SK1.C5
  Bottom Layer w0.254: IC1.2 31.877,27.432 31.877,24.638 41.486,15.029 41.486,14.408 41.59,14.303 R3.2 v1(64.543,14.097)
Phi2: IC1.1 R4.2 SK1.C7 | length 117.1
  GND w0.254: v1@134.62,13.589 134.62,19.304 SK1.C7
  Bottom Layer w0.254: IC1.1 33.147,24.257 41.783,15.621 68.199,15.621 72.136,11.684 95.754,11.684 96.138,12.068 111.218,12.068 111.221,12.065 125.222,12.065 126.111,12.065 126.365,11.811 132.712,11.811 134.448,13.547 v1(134.596,13.547)
RST: IC1.9 U1.4 | length 9.4
  Bottom Layer w0.254: IC1.9 43.307,22.606 45.781,20.132 U1.4
Seq: IC1.15 RN8.2 | length 15
  Bottom Layer w0.254: RN8.2@40.513,22.993 40.513,24.384 39.497,25.4 39.497,29.972 41.656,32.131 44.958,32.131 IC1.15
Spvmd: IC1.10 RN8.4 | length 6.2
  Bottom Layer w0.254: RN8.4@42.037,23.012 42.037,27.432 IC1.10
WaitN: SK1.C17
xA0: RN7.5 SK1.A4 | length 12.3
  Bottom Layer w0.254: RN7.5 142.1,24.27 144.78,21.59 144.78,16.764 SK1.A4
xA1: RN7.6 SK1.A5 | length 11.6
  Bottom Layer w0.254: SK1.A5 142.24,16.764 142.24,21.463 141.3,22.403 RN7.6
xA2: RN7.7 SK1.A6 | length 11.5
  Bottom Layer w0.254: SK1.A6 139.7,16.764 139.7,21.59 140.5,22.39 RN7.7
xA3: RN7.8 SK1.A7 | length 12.2
  Bottom Layer w0.254: SK1.A7 137.239,16.843 137.239,21.542 139.7,24.003 RN7.8
xA4: RN6.5 SK1.A8 | length 12.3
  Bottom Layer w0.254: RN6.5 131.94,24.016 134.62,21.336 134.62,16.764 SK1.A8
xA5: RN6.6 SK1.A9 | length 11.6
  Bottom Layer w0.254: SK1.A9 132.08,16.764 132.08,21.336 131.14,22.276 RN6.6
xA6: RN6.7 SK1.A10 | length 11.5
  Bottom Layer w0.254: SK1.A10 129.54,16.764 129.54,21.717 130.34,22.517 RN6.7
xA7: RN6.8 SK1.A11 | length 12.2
  Bottom Layer w0.254: SK1.A11 127.079,16.843 127.079,21.415 129.54,23.876 RN6.8
xA8: RN5.5 SK1.A12 | length 12.3
  Bottom Layer w0.254: RN5.5 121.85,24.073 124.46,21.463 124.46,16.764 SK1.A12
xA9: RN5.6 SK1.A13 | length 11.6
  Bottom Layer w0.254: SK1.A13 121.92,16.764 121.92,21.463 121.05,22.333 RN5.6
xA10: RN5.7 SK1.A14 | length 11.6
  Bottom Layer w0.254: SK1.A14 119.38,16.764 119.38,21.717 120.25,22.587 RN5.7
xA11: RN5.8 SK1.A15 | length 12.3
  Bottom Layer w0.254: SK1.A15 116.84,16.764 116.84,21.336 119.45,23.946 RN5.8
xA12: RN4.5 SK1.A16 | length 12.3
  Bottom Layer w0.254: RN4.5 111.69,24.073 114.3,21.463 114.3,16.764 SK1.A16
xA13: RN4.6 SK1.A17 | length 11.6
  Bottom Layer w0.254: SK1.A17 111.76,16.764 111.76,21.336 110.89,22.206 RN4.6
xA14: RN4.7 SK1.A18 | length 11.6
  Bottom Layer w0.254: SK1.A18 109.22,16.764 109.22,21.336 110.09,22.206 RN4.7
xA15: RN4.8 SK1.A19 | length 12.3
  Bottom Layer w0.254: SK1.A19 106.68,16.764 106.68,21.336 109.29,23.946 RN4.8
xA16: RN3.5 SK1.A20 | length 12.3
  Bottom Layer w0.254: RN3.5 101.53,24.327 104.14,21.717 104.14,16.764 SK1.A20
xA17: RN3.6 SK1.A21 | length 11.6
  Bottom Layer w0.254: SK1.A21 101.6,16.764 101.6,21.463 100.73,22.333 RN3.6
xA18: RN3.7 SK1.A22 | length 11.6
  Bottom Layer w0.254: SK1.A22 99.06,16.764 99.06,21.336 99.93,22.206 RN3.7
xA19: RN3.8 SK1.A23 | length 12.3
  Bottom Layer w0.254: SK1.A23 96.52,16.764 96.52,21.209 99.13,23.819 RN3.8
xA20: RN2.5 SK1.A24 | length 13.4
  Bottom Layer w0.254: RN2.5 93.179,26.201 93.98,25.4 93.98,16.764 SK1.A24
xA21: RN2.6 SK1.A25 | length 11.6
  Bottom Layer w0.254: SK1.A25 91.44,16.764 91.44,21.59 90.57,22.46 RN2.6
xA22: RN2.7 SK1.A26 | length 11.6
  Bottom Layer w0.254: SK1.A26 88.979,16.843 88.979,21.288 89.77,22.079 RN2.7
xA23: RN2.8 SK1.A27 | length 12.8
  Bottom Layer w0.254: SK1.A27 86.36,16.764 86.36,21.336 86.995,21.971 87.757,21.971 88.97,23.184 88.97,23.946 RN2.8
xA24: RN1.5 SK1.A28 | length 13.1
  Bottom Layer w0.254: RN1.5 82.599,26.24 83.82,25.019 83.82,16.976 82.55,15.706 SK1.A28
xA25: RN1.6 SK1.A29 | length 13
  Bottom Layer w0.254: SK1.A29 81.28,16.764 81.28,21.336 82.169,22.225 82.169,25.019 81.788,25.4 80.772,25.4 80.527,25.645 80.527,26.142 RN1.6
xD0: RN17.5 SK1.B32 | length 15.8
  Top Layer w0.254: RN17.5 60.892,11.725 61.607,11.725 62.418,12.536 62.418,12.806 62.738,13.126 62.738,15.577 64.179,17.018 66.408,17.018 67.424,18.034 SK1.B32
xD1: RN17.6 SK1.B31 | length 19.1
  Top Layer w0.254: RN17.6 61.591,12.427 61.91,12.747 61.91,13.017 62.23,13.336 62.23,14.986 62.23,15.788 63.968,17.526 66.198,17.526 67.976,19.304 73.66,19.304 SK1.B31
xD2: RN17.7 SK1.B30 | length 24.5
  Top Layer w0.254: RN17.7 60.892,13.325 61.476,13.325 61.625,13.474 61.625,15.901 63.758,18.034 65.987,18.034 69.797,21.844 75.819,21.844 76.2,21.463 76.2,19.304 SK1.B30
xD3: RN17.8 SK1.B29 | length 27
  Top Layer w0.254: RN17.8 61.019,14.027 61.117,14.125 61.117,16.112 63.547,18.542 65.777,18.542 69.714,22.479 69.85,22.479 77.724,22.479 78.74,21.463 78.74,19.304 SK1.B29
xD4: RN16.5 SK1.B28 | length 9.2
  Top Layer w0.254: RN16.5@76.923,23.692 79.013,23.692 81.28,21.425 81.28,19.304 SK1.B28
xD5: RN16.6 SK1.B27 | length 12.8
  Top Layer w0.254: RN16.6 79.15,24.413 79.502,24.765 81.026,24.765 83.82,21.971 83.82,19.304 SK1.B27
xD6: RN16.7 SK1.B26 | length 15.5
  Top Layer w0.254: RN16.7@76.923,25.292 83.42,25.292 86.36,22.352 86.36,19.304 SK1.B26
xD7: RN16.8 SK1.B25 | length 17.7
  Top Layer w0.254: RN16.8 83.875,26.013 88.979,20.909 88.979,19.225 SK1.B25
xD8: RN15.5 SK1.B24 | length 8.1
  Top Layer w0.254: RN15.5 91.221,24.708 91.44,24.489 91.44,19.304 SK1.B24
xD9: RN15.6 SK1.B23 | length 10.2
  Top Layer w0.254: RN15.6 90.404,25.527 91.567,25.527 93.976,23.118 93.976,19.308 SK1.B23
xD10: RN15.7 SK1.B22 | length 12.5
  Top Layer w0.254: RN15.7 92.31,26.308 96.52,22.098 96.52,19.304 SK1.B22
xD11: RN15.8 SK1.B21 | length 14.9
  Top Layer w0.254: RN15.8 93.288,27.108 99.06,21.336 99.06,19.304 SK1.B21
xD12: RN14.5 SK1.B20 | length 9.7
  Top Layer w0.254: SK1.B20 104.14,19.304 104.14,21.717 106.623,24.2 RN14.5
xD13: RN14.6 SK1.B19 | length 9
  Top Layer w0.254: SK1.B19 106.68,19.304 106.68,22.453 107.423,23.196 RN14.6
xD14: RN14.7 SK1.B18 | length 9.1
  Top Layer w0.254: SK1.B18 109.22,19.304 109.22,22.247 108.223,23.244 RN14.7
xD15: RN14.8 SK1.B17 | length 9.8
  Top Layer w0.254: RN14.8 109.023,24.065 111.76,21.328 111.76,19.304 SK1.B17
xD16: RN13.5 SK1.B16 | length 9.7
  Top Layer w0.254: SK1.B16 114.3,19.304 114.3,21.717 116.783,24.2 RN13.5
xD17: RN13.6 SK1.B15 | length 9
  Top Layer w0.254: SK1.B15 116.84,19.304 116.84,22.453 117.583,23.196 RN13.6
xD18: RN13.7 SK1.B14 | length 9.1
  Top Layer w0.254: SK1.B14 119.38,19.304 119.38,22.247 118.383,23.244 RN13.7
xD19: RN13.8 SK1.B13 | length 9.8
  Top Layer w0.254: RN13.8 119.183,24.065 121.92,21.328 121.92,19.304 SK1.B13
xD20: RN12.5 SK1.B12 | length 9.7
  Top Layer w0.254: SK1.B12 124.46,19.304 124.46,21.463 126.943,23.946 RN12.5
xD21: RN12.6 SK1.B11 | length 9
  Top Layer w0.254: SK1.B11 127.079,19.383 127.079,22.532 127.743,23.196 RN12.6
xD22: RN12.7 SK1.B10 | length 9.1
  Top Layer w0.254: SK1.B10 129.54,19.304 129.54,22.247 128.543,23.244 RN12.7
xD23: RN12.8 SK1.B9 | length 9.8
  Top Layer w0.254: RN12.8 129.343,24.065 132.08,21.328 132.08,19.304 SK1.B9
xD24: RN11.5 SK1.B8 | length 9.7
  Top Layer w0.254: SK1.B8 134.62,19.304 134.62,21.59 137.103,24.073 RN11.5
xD25: RN11.6 SK1.B7 | length 9
  Top Layer w0.254: SK1.B7 137.239,19.383 137.239,22.532 137.903,23.196 RN11.6
xD26: RN11.7 SK1.B6 | length 9.1
  Top Layer w0.254: SK1.B6 139.7,19.304 139.7,22.247 138.703,23.244 RN11.7
xD27: RN11.8 SK1.B5 | length 9.8
  Top Layer w0.254: RN11.8 139.503,24.065 142.24,21.328 142.24,19.304 SK1.B5
xD28: RN10.8 SK1.B4 | length 26.3
  Top Layer w0.254: SK1.B4 144.701,16.843 144.701,14.557 145.669,13.589 152.146,13.589 153.162,14.605 153.162,21.59 149.663,25.089 RN10.8
xD29: RN10.7 SK1.B3 | length 22.7
  Top Layer w0.254: SK1.B3 146.05,17.664 146.448,17.267 146.448,17.255 147.32,16.383 147.32,14.605 147.828,14.097 151.892,14.097 152.654,14.859 152.654,17.526 152.654,21.336 148.863,25.127 RN10.7
xD30: RN10.6 SK1.B2 | length 9.4
  Top Layer w0.254: RN10.6 148.063,25.165 149.86,23.368 149.86,19.304 SK1.B2
xD31: RN10.5 SK1.B1 | length 13.5
  Top Layer w0.254: RN10.5 147.263,17.329 147.828,16.764 149.86,16.764 SK1.B1
xMreqN: RN8.6 SK1.C13 | length 90.4
  GND w0.254: v1(119.38,13.862) 119.38,19.304 SK1.C13
  Bottom Layer w0.254: RN8.6 41.294,19.031 43.18,17.145 69.055,17.145 72.992,13.208 95.123,13.208 95.507,13.592 111.849,13.592 111.852,13.589 118.959,13.589 119.232,13.862 v1(119.38,13.862)
xnBW: RN1.8 SK1.C22 | length 24.5
  GND w0.254: SK1.C22 v1(97.79,24.13)
  Bottom Layer w0.254: RN1.8 78.927,26.338 78.927,26.982 79.016,27.071 86.974,27.071 86.975,27.07 94.85,27.07 v1(97.79,24.13)
xnRW: RN8.8 SK1.C10 | length 101.4
  GND w0.254: v1(127,12.973) 127,19.304 SK1.C10
  Bottom Layer w0.254: RN8.8@39.624,21.597 39.624,18.796 42.291,16.129 68.409,16.129 72.346,12.192 95.544,12.192 95.928,12.576 111.428,12.576 111.431,12.573 125.349,12.573 125.749,12.973 v1(127,12.973)
xSeq: RN8.7 SK1.C11 | length 96.9
  GND w0.254: v1(124.46,13.462) 124.46,19.304 SK1.C11
  Bottom Layer w0.254: RN8.7@40.513,21.372 40.513,18.923 42.799,16.637 68.707,16.637 72.644,12.7 95.333,12.7 95.717,13.084 111.638,13.084 111.641,13.081 124.038,13.081 124.419,13.462 v1(124.46,13.462)
xSpvmd: RN8.5 SK1.C14 | length 87.2
  GND w0.254: v1(116.84,14.37) 116.84,19.304 SK1.C14
  Bottom Layer w0.254: RN8.5 42.094,19.247 43.688,17.653 69.384,17.653 70.273,16.764 73.152,16.764 73.66,16.256 73.66,14.478 74.422,13.716 94.488,13.716 94.872,14.1 112.059,14.1 112.062,14.097 116.419,14.097 116.692,14.37 v1(116.84,14.37)
pads on no net: IC1.4 IC1.13 IC1.14 IC1.82 RN1.2 RN1.7 SK1.C18 SK1.MH1 SK1.MH2 U1.1

## Polygon pours and split planes (outlines as drawn)
GND on GND "NONET_L-01_P-001" (solid, pour order 1): 0,10.033 159.004,10.033 159.004,70.231 0,70.231
GND on Bottom Layer "NONET_L-01_P-001" (solid, remove dead copper, pour order 2): 0,10.033 159.004,10.033 159.004,70.231 0,70.231
GND on Top Layer "NONET_L-01_P-001" (solid, remove dead copper, pour order 3): 0,10.033 159.004,10.033 159.004,70.231 0,70.231
5V on 5V "NONET_L-01_P-001" (solid, pour order 0): 0,10.033 159.004,10.033 159.004,70.231 0,70.231

## Keep-outs
Keep-Out Layer:
  the board outline again, w1.2

## Silkscreen, mask and mechanical layers (free items; w line width, h text height)
Top Overlay:
  lines w0.254: 49.149,23.876 50.673,25.4 ; 50.419,23.876 50.673,24.13 ; 61.468,11.684 61.849,12.065 ; 77.47,23.622 78.232,24.384 ; 147.447,24.384 147.447,25.527 ; 150.114,25.908 150.622,25.908
  text "A540/R260 ARM2" at 71.628,65.786 h1.52
  text "Ian Jeffray, 2023" at 74.676,62.484 h1.52
  text "©" at 71.501,62.23 h3
  text "D<28>" at 150.899,25.169 h1
  text "D<4>" at 78.302,24.633 h1
  text "D<31>" at 147.343,23.137 h1
  text "1" at 32.893,20.701 h1.52
  text "D<0>" at 63.069,12.244 h1 r90
  text "JLCJLCJLCJLC" at 102.435,11.884 h1
Bottom Overlay:
  circle w0.15: c45.847,56.642 r1.27
  circle w0.15: c17.907,54.102 r1.27
  circle w0.15: c20.447,26.162 r1.27
  lines w0.254: 49.276,53.594 49.784,53.086 ; 49.53,28.321 50.228,28.321 50.482,28.067 ; 79.629,25.019 80.264,25.654 ; 141.478,24.892 142.113,25.527
  text "GND" at 46.967,60.094 h1
  text "35" at 46.99,58.293 h1.52
  text "53" at 21.59,57.912 h1.52
  text "GND" at 13.312,53.617 h1
  text "54" at 16.256,53.34 h1.52
  text "32" at 52.705,51.816 h1.52
  text "44" at 34.544,51.308 h1.52
  text "2" at 33.655,30.099 h1.52
  text "74" at 16.51,27.94 h1.52
  text "12" at 53.213,27.051 h1.52
  text "A<25>" at 79.352,24.026 h1
  text "A<0>" at 141.201,23.899 h1
  text "1" at 33.401,23.241 h1.52
  text "11" at 46.609,23.241 h1.52
  text "75" at 21.717,22.987 h1.52
  text "GND" at 21.821,21.613 h1
Board Shape:
  the board outline again, w1.2